# Altium PCB SLT.PcbDoc (part 6 of 8)
Units mm, origin at the board's own origin, x right, y up, seen from the top; angles counter-clockwise.
Board outline 150 x 66 mm, 6 copper layers (L1 TOP, L2 GND 1, L3 SIGNAL, L4 PWR, L5 GND 2, L6 BOT), stack 1.598 mm thick; 797 components, 541 nets, 2680 pads, 2120 vias.
Unrouted connection lines stored in the file: 31.
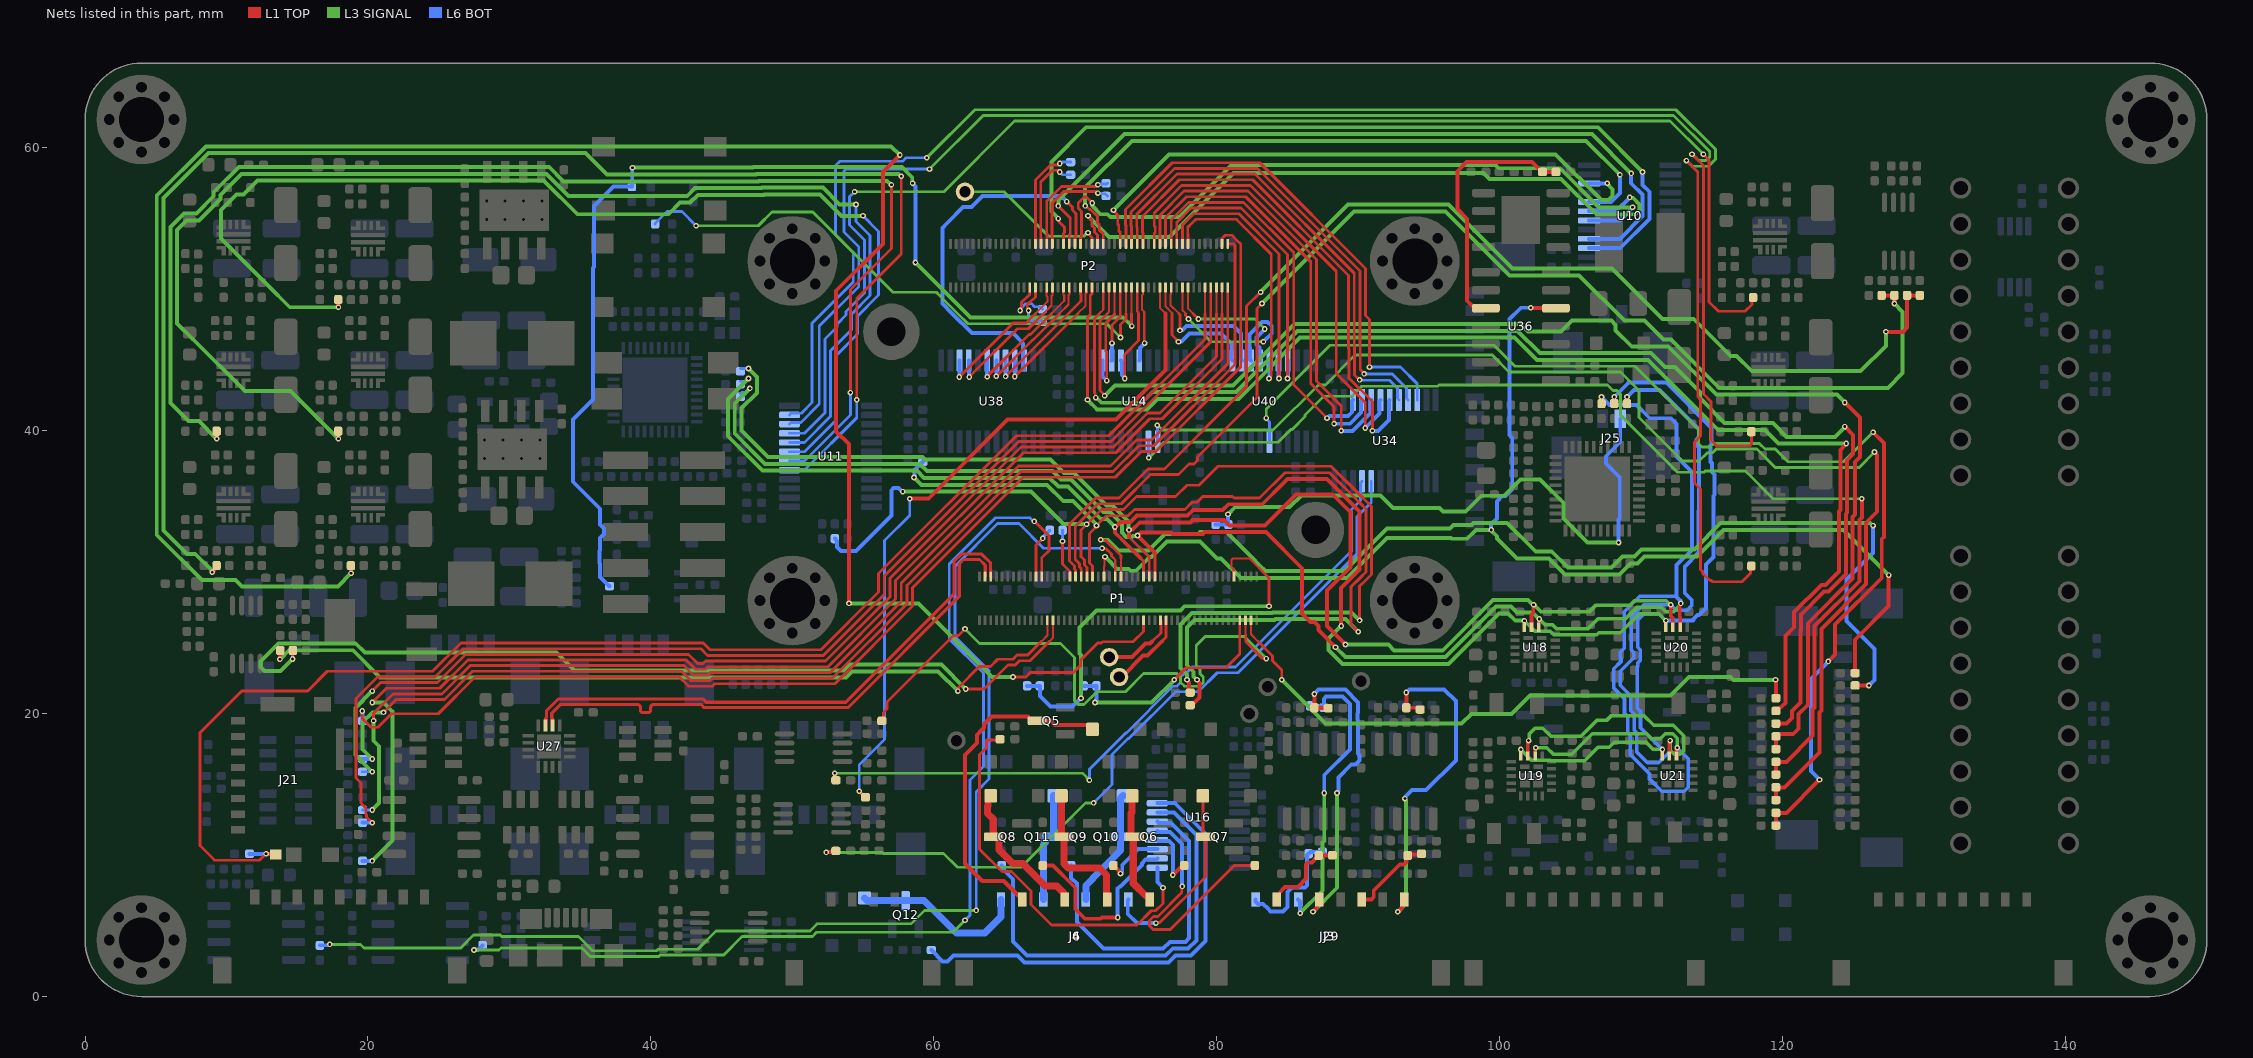
[diagram p10: the nets of this part, all layers, seen from the top]

## Via types
v1: diameter 0.4, hole 0.2, L1 TOP to L6 BOT, tented both sides, 2120 vias

## Nets (pads, with @x,y where several pads share a name; then routed paths per layer and width w, separated by ;. In a path a pad name is that pad's centre, name@x,y a point inside that pad or via, vN(x,y) a via of type N, cw(c..) or ccw(c..) an arc to the next point about the centre after c; other vN are vias at no path point) (continued)
NTC3-: J3.6 R170.1 R173.2 | length 21.1
  L3 SIGNAL w0.28: v1(85.9,5.9) 87.49,7.49 87.49,10.89 87.6,11 v1(87.6,14.4)
  L6 BOT w0.28: J3.6@85.75,6.87 85.877,6.743 85.877,5.923 v1(85.9,5.9) ; R170.1@86.595,20.56 86.657,20.497 87.507,20.497 R173.2@87.57,20.435 87.57,21.056 87.734,21.22 88.896,21.22 89.411,20.705 89.411,17.471 87.6,15.661 v1(87.6,14.4)
NTC4-: J3.8 R176.1 R179.2 | length 9
  L6 BOT w0.28: J3.8@82.75,6.87 82.75,6.723 82.91,6.563 83.277,6.563 83.61,6.229 83.809,6.03 84.691,6.03 85,6.339 85,7.401 85.309,7.71 86.224,7.71 86.388,7.874 86.388,10.003 86.62,10.235 R179.2@87.47,10.235 87.49,10.235 R179.2@87.649,10.076
NTC5-: J29.2 R160.1 R162.2 | length 6
  L1 TOP w0.28: J29.2@84.25,6.87 84.41,7.03 84.41,7.31 84.84,7.74 85.74,7.74 86.1,8.1 86.1,8.157 86.3,8.357 86.3,9.336 86.464,9.5 86.725,9.5 87.021,9.796 87.041,9.796 87.2,9.955 R160.1@87.2,9.975 87.212,9.987 88.163,9.987 R162.2@88.175,10
NTC6-: J29.4 R166.1 R168.2 | length 23
  L1 TOP w0.28: v1(86.8,6) 87.09,6.29 87.09,6.71 J29.4@87.25,6.87 ; v1(86.9,21.4) R166.1@86.9,20.425 86.925,20.4 R168.2@87.875,20.4
  L3 SIGNAL w0.28: v1(86.8,6) 88.5,7.7 v1(88.5,14.4)
  L6 BOT w0.28: v1(86.9,21.4) 87.2,21.7 89.1,21.7 90,20.8 90,20.074 89.95,20.024 89.95,19.576 90,19.526 90,17.193 90.09,17.103 90.09,16.697 89.803,16.41 89.51,16.41 88.6,15.5 88.6,14.532 88.5,14.432 v1(88.5,14.4)
NTC7-: J29.6 R172.1 R174.2 | length 6
  L1 TOP w0.28: J29.6@90.25,6.87 90.936,6.87 91.1,7.034 91.1,7.501 92.939,9.34 93.236,9.34 93.4,9.504 93.4,9.875 R172.1@93.5,9.975 ; R172.1@93.562,10.038 94.413,10.038 R174.2@94.475,10.1
NTC8-: J29.8 R178.1 R180.2 | length 24.3
  L1 TOP w0.28: v1(92.8,6) 93.09,6.29 93.09,6.71 J29.8@93.25,6.87 ; v1(93.4,21.5) R178.1@93.4,20.425 94.25,20.425 R180.2@94.375,20.3
  L3 SIGNAL w0.28: v1(92.8,6) 93.39,6.59 93.39,13.878 93.3,13.968 v1(93.3,14)
  L6 BOT w0.28: v1(93.3,14) 93.323,14.023 93.323,14.123 93.8,14.6 94.8,14.6 96.9,16.7 96.9,20.9 96.08,21.72 93.634,21.72 93.414,21.5 v1(93.4,21.5)
PHOTO_ADC_CONV: R62.1 R256.2 U14.16 | length 87.8
  L1 TOP w0.28: R256.2@119.525,13.9 R62.1@119.525,14.8 120.136,14.8 122.61,17.274 122.61,20.103 122.74,20.233 122.74,25.998 125.91,29.168 125.91,33.503 126.69,34.283 126.69,38.278 126.5,38.468 v1(126.5,38.5)
  L3 SIGNAL w0.2: v1(75.8,40.4) 75.807,40.4 76.157,40.05 83.984,40.05 87.184,43.25 87.686,43.25 89.786,45.35 99.478,45.35 100.66,44.168 108.534,44.168 109.85,42.852 109.85,40.934 112.914,37.87 114.102,37.87 114.682,38.45 115.042,38.45 115.308,38.715 118.183,38.715 119.474,37.424 119.483,37.415 121.476,37.415 125.415,37.415 v1(126.5,38.5)
  L6 BOT w0.2: v1(75.8,40.4) 75.813,40.388 75.813,39.242 U14.16@75.825,39.23
PHOTO_ADC_CS: R61.1 R85.2 U14.17 | length 80.5
  L1 TOP w0.28: R61.1@119.525,15.7 R85.2@119.525,16.6 120.27,16.6 122.13,18.46 122.13,20.302 122.26,20.432 122.26,26.196 125.43,29.366 125.43,33.702 125.6,33.872 v1(125.6,35.2)
  L3 SIGNAL w0.2: v1(75.2,38.1) 76.29,39.19 84.322,39.19 85.232,40.1 85.336,40.1 86.25,41.014 86.25,41.118 87.582,42.45 89.553,42.45 90.253,43.15 95.606,43.15 95.706,43.25 107.614,43.25 108.014,42.85 108.286,42.85 108.55,42.586 108.55,41.102 112.582,37.07 114.434,37.07 114.514,37.15 116.477,37.15 117.372,37.15 119.322,35.2 121.476,35.2 v1@125.624,35.2
  L6 BOT w0.2: U14.17@75.175,39.23 75.187,39.218 75.187,38.113 v1(75.2,38.1)
PHOTO_ADC_EOC: R63.1 R275.2 U40.18 | length 84.5
  L1 TOP w0.28: R63.1@119.525,12.1 R275.2@119.525,13 120.27,13 v1(122.61,15.34) ; v1(123.23,23.7) 123.72,24.19 123.72,26.299 127.01,29.589 127.01,32.344 127.17,32.504 127.17,39.13 v1(126.4,39.9)
  L3 SIGNAL w0.2: v1(83.5,40.9) 83.5,41.536 88.017,46.054 99.61,46.054 101.095,44.568 109.568,44.568 114.05,40.086 114.05,39.114 114.314,38.85 114.877,38.85 115.142,39.115 118.348,39.115 118.748,38.715 119.481,38.715 120.381,37.815 124.315,37.815 v1(126.4,39.9)
  L6 BOT w0.2: v1(83.5,40.9) 83.5,40.846 83.725,40.621 U40.18@83.725,39.23
  L6 BOT w0.28: v1(122.61,15.34) 122,15.95 122,22.47 v1(123.23,23.7)
PHOTO_SPI7_MISO: P2.56 R59.1 | length 91.1
  L1 TOP w0.15: 71.711,48.3 71.979,48.568 P2.56@71.979,50.14
  L1 TOP w0.2: v1(71.45,42.35) 71.412,42.388 71.412,42.627 71.35,42.688 71.35,47.939 71.711,48.3
  L1 TOP w0.28: R59.1@119.525,19.3 120.27,19.3 120.66,19.69 120.66,20.189 121.27,20.799 121.27,25.885 121.3,25.915 121.3,27 122.937,28.637 123.237,28.637 124.47,29.87 124.47,34.114 124.563,34.207 124.563,37.921 124.99,38.348 124.99,39.71 v1(124.4,40.3)
  L3 SIGNAL w0.28: v1(71.45,42.35) 71.482,42.35 71.847,41.985 74.712,41.985 75.457,42.73 81.358,42.73 85.698,47.07 101.258,47.07 102.84,45.488 110.697,45.488 111.675,44.51 112.383,44.51 114.146,42.747 114.146,42.318 115.909,40.555 116.476,40.555 119.312,40.555 119.343,40.524 120.292,39.575 123.695,39.575 124.4,40.28 v1(124.4,40.3)
PHOTO_SPI7_MOSI: P2.52 R58.1 | length 88.4
  L1 TOP w0.2: v1(70.866,42.191) 70.866,48.021 71.054,48.209 71.054,48.3 71.054,49.566 71.179,49.691 P2.52@71.179,50.14
  L1 TOP w0.28: R58.1@119.525,20.2 119.555,20.2 119.815,20.46 119.903,20.46 120.19,20.747 120.19,25.484 120.82,26.114 120.82,27.199 122.738,29.117 123.038,29.117 123.99,30.069 123.99,34.313 124.083,34.406 124.083,38.651 124.5,39.068 v1(124.5,39.1)
  L3 SIGNAL w0.28: v1(70.866,42.191) 71.553,41.505 75.081,41.505 75.826,42.25 81.557,42.25 85.897,46.59 101.059,46.59 102.641,45.008 110.498,45.008 115.451,40.055 118.763,40.055 119.723,39.095 124.495,39.095 v1(124.5,39.1)
PHOTO_SPI7_SCK: P1.98 R57.1 | length 44
  L1 TOP w0.15: P1.98@82.425,26.61 82.425,25.611 82.936,25.1
  L1 TOP w0.2: 82.936,25.1 83.95,24.086 83.95,23.75 84.6,23.1 v1(84.6,22.4)
  L1 TOP w0.28: R57.1@119.525,21.1 v1@119.525,22.4
  L3 SIGNAL w0.28: v1(84.6,22.4) 87.69,19.31 97.317,19.31 97.997,19.99 100.852,19.99 102.152,21.29 112.069,21.29 113.369,22.59 116.323,22.59 116.513,22.4 v1(119.5,22.4)
PHOTO_SW_CS: P2.58 R60.1 R84.2 | length 93.7
  L1 TOP w0.15: 72.276,48.3 72.379,48.403 P2.58@72.379,50.14
  L1 TOP w0.2: v1(72.075,42.475) 72.075,42.529 71.75,42.854 71.75,47.774 72.276,48.3
  L1 TOP w0.28: R84.2@119.525,17.5 R60.1@119.525,18.4 119.679,18.554 120.754,18.554 121.14,18.94 121.14,19.991 121.78,20.631 121.78,26.395 124.95,29.565 124.95,33.916 125.11,34.076 125.11,37.789 125.47,38.149 125.47,40.93 v1(124.4,42)
  L3 SIGNAL w0.28: v1(72.075,42.475) 72.81,43.21 81.159,43.21 85.499,47.55 101.457,47.55 101.997,47.01 104.327,47.01 105.107,47.79 107.903,47.79 108.2,47.493 108.2,47.107 109.339,45.968 111.918,45.968 115.323,42.562 116.476,42.562 121.475,42.562 123.838,42.562 v1(124.4,42)
PMIC_ON_REQ: P1.68 TP4.0 | length 5.5
  L1 TOP w0.2: 76.115,25.1 76.425,25.41 P1.68@76.425,26.61
  L1 TOP w0.28: TP4.0@73.3,22.6 74.802,24.102 75.118,24.102 76.115,25.1
PMIC_STBY_REQ: P1.66 TP3.0 | length 5.3
  L1 TOP w0.2: 75.436,25.1 76.05,25.714 76.05,26.585 P1.66@76.025,26.61
  L1 TOP w0.28: TP3.0@72.4,24 74.021,24 74.976,24.954 75.291,24.954 75.436,25.1
POR_B_3P3: P2.66 R77.2 R252.2 | length 79.5
  L1 TOP w0.15: 73.979,48.3 P2.66@73.979,50.14
  L1 TOP w0.2: 73.979,48.3 73.979,47.421 v1(74,47.4)
  L3 SIGNAL w0.28: v1(38.7,58.6) 47.217,58.6 47.252,58.635 57.758,58.635 58.477,57.916 58.477,57.523 v1(58.5,57.5) ; v1(58.7,51.9) 60.4,50.2 62.3,48.3 62.59,48.01 73.39,48.01 v1(74,47.4)
  L6 BOT w0.28: R252.2@37.075,29.025 37.05,29.025 36.41,29.665 36.41,30.599 36.36,30.649 36.36,31.509 36.41,31.559 36.41,32.417 36.69,32.697 36.69,33.103 36.41,33.383 36.41,34.49 34.5,36.4 34.5,40.8 35.9,42.2 35.9,51.502 35.99,51.592 35.99,55.89 37.364,57.264 R77.2@38.665,57.264 38.683,57.282 38.683,58.583 v1(38.7,58.6) ; v1(58.5,57.5) 58.5,57.468 58.7,57.268 v1(58.7,51.9)
POW_ONOFF_CAM: R304.2 U11.9 | length 98.1
  L1 TOP w0.2: v1(114.4,59.55) 114.8,59.15 114.8,49.117 115.467,48.45 117.35,48.45 117.836,48.936 117.836,49.335 R304.2@117.917,49.416
  L3 SIGNAL w0.2: v1(54.4,56.9) 60.715,56.9 65.715,61.9 112.05,61.9 v1(114.4,59.55)
  L6 BOT w0.2: U11.9@49.8,39.825 50.85,39.825 52.3,41.275 52.3,46.5 53.15,47.35 53.15,47.534 53.8,48.184 53.8,48.431 55.1,49.731 55.1,53.5 54.05,54.55 54.05,56.543 54.4,56.893 v1(54.4,56.9)
POW_ONOFF_HD4: R31.2 U11.7 | length 81.7
  L1 TOP w0.3: R31.2@17.9,49.275 17.904,49.271 17.904,48.739 v1(17.908,48.735)
  L3 SIGNAL w0.28: v1(17.908,48.735) 14.472,48.735 12.901,50.306 9.61,53.597 9.61,55.603 10.607,56.6 10.717,56.71 11.217,56.71 12.197,57.69 32.419,57.69 34.799,55.31 41.251,55.31 42.071,56.13 42.771,56.13 43.321,56.68 48.012,56.68 48.047,56.715 51.953,56.715 53.468,55.2 v1(55,55.2)
  L6 BOT w0.2: U11.7@49.8,38.525 50.85,38.525 53.1,40.775 53.1,45.334 54.6,46.834 54.6,48.1 56.1,49.6 56.1,54.1 v1(55,55.2)
POW_ONOFF_Heater: R18.2 U11.5 | length 107.7
  L1 TOP w0.2: v1(54.55,42.2) 54.55,49.35 57.7,52.5 v1(57.7,58)
  L1 TOP w0.3: v1(9,30) 9,30.027 9.15,30.177 9.15,30.325 R18.2@9.3,30.475
  L3 SIGNAL w0.28: v1(9,30) 9,30.032 8.89,30.142 8.89,30.203 7.793,31.3 7.7,31.3 7.207,31.3 5.551,32.956 5.551,56.443 8.738,59.63 35.37,59.63 36.89,58.11 41.938,58.11 41.948,58.12 47.416,58.12 47.451,58.155 57.513,58.155 57.668,58 v1(57.7,58)
  L6 BOT w0.2: U11.5@49.8,37.225 50.85,37.225 54.55,40.925 v1(54.55,42.2)
POW_ONOFF_IO: P1.60 R15.2 | length 153.6
  L1 TOP w0.2: v1(65.6,22.6) 66.51,22.6 66.82,22.91 69.869,22.91 70.39,23.431 70.39,23.79 71.59,24.99 71.849,24.99 71.949,25.09 74.09,25.09 74.825,25.825 P1.60@74.825,26.61
  L1 TOP w0.28: v1(54,27.8) 54,39.068 53.1,39.968 53.1,49.9 56.4,53.2 56.4,58.3 v1(57.6,59.5)
  L1 TOP w0.3: R15.2@18.8,30.475 18.804,30.471 18.804,29.939 v1(18.808,29.935)
  L3 SIGNAL w0.28: v1(18.808,29.935) 17.883,29.01 11.083,29.01 10.648,29.445 8.262,29.445 5.071,32.636 5.071,56.642 8.539,60.11 56.99,60.11 v1(57.6,59.5) ; v1(54,27.8) 58.929,27.8 64.129,22.6 v1(65.6,22.6)
POW_ONOFF_Laser: R335.2 U11.11 | length 123
  L1 TOP w0.2: v1(113.2,59.1) 114,58.3 114,42.434 114.2,42.234 114.2,39.636 113.95,39.386 113.95,39.372 113.77,39.192 113.77,36.315 114.2,35.885 114.2,30.2 114.36,30.04 114.36,29.918 114.86,29.418 114.975,29.418 115.058,29.335 117.135,29.335 117.736,29.936 117.736,30.383 R335.2@117.793,30.44
  L3 SIGNAL w0.2: v1(59.5,59.3) 62.9,62.7 112.452,62.7 115.25,59.902 115.25,59.198 114.752,58.7 113.6,58.7 v1(113.2,59.1)
  L6 BOT w0.2: U11.11@49.8,41.125 49.917,41.242 50.642,41.242 51.4,42 51.4,47.6 54.3,50.5 54.3,52.614 53.05,53.864 53.05,58.75 53.35,59.05 57.786,59.05 58.036,59.3 v1@59.493,59.3
POW_ONOFF_Photo: R327.2 U11.10 | length 111.2
  L1 TOP w0.2: v1@113.616,59.534 114.4,58.75 114.4,42.6 114.95,42.05 114.95,39.326 115.076,39.2 115.326,38.95 117.679,38.95 117.796,39.067 117.796,39.936 R327.2@117.792,39.94
  L3 SIGNAL w0.2: v1(59.7,58.5) 63.5,62.3 112.286,62.3 114.85,59.736 114.85,59.364 114.586,59.1 114.05,59.1 v1(113.6,59.55)
  L6 BOT w0.2: U11.10@49.8,40.475 49.917,40.592 50.601,40.592 51.9,41.892 51.9,47.4 54.7,50.2 54.7,53 53.65,54.05 53.65,58.35 53.8,58.5 v1(59.7,58.5)
POW_ONOFF_Solenoid: R37.2 U11.6 | length 93.9
  L1 TOP w0.2: v1(54.1,42.7) 54.1,50 57,52.9 v1(57,57.4)
  L1 TOP w0.3: R37.2@9.3,39.975 9.304,39.971 9.304,39.439 v1(9.308,39.435)
  L3 SIGNAL w0.28: v1(9.308,39.435) 8.043,40.7 7.307,40.7 6.031,41.976 6.031,54.403 6.986,55.358 7.601,55.358 7.868,55.358 9.092,56.582 9.092,56.6 9.092,56.864 10.878,58.65 32.816,58.65 33.836,57.63 42.914,57.63 42.924,57.64 47.614,57.64 47.649,57.675 56.693,57.675 56.968,57.4 v1(57,57.4)
  L6 BOT w0.2: U11.6@49.8,37.875 50.85,37.875 54.1,41.125 v1(54.1,42.7)
POW_ONOFF_TEC: R47.2 U11.8 | length 93.3
  L1 TOP w0.3: R47.2@17.9,39.975 17.904,39.971 17.904,39.439 v1(17.908,39.435)
  L3 SIGNAL w0.28: v1(17.908,39.435) 14.533,42.81 12.901,42.81 11.298,42.81 7.601,46.507 6.511,47.597 6.511,54.204 7.185,54.878 7.601,54.878 8.067,54.878 9.572,56.383 9.572,56.6 9.572,56.665 11.077,58.17 32.617,58.17 34.177,56.61 42.573,56.61 43.123,57.16 47.813,57.16 47.848,57.195 52.152,57.195 53.347,56 v1(54.5,56)
  L6 BOT w0.2: U11.8@49.8,39.175 50.85,39.175 52.7,41.025 52.7,45.664 54.2,47.164 54.2,48.266 55.5,49.566 55.5,53.8 54.5,54.8 v1(54.5,56)
RTC_BAT: C229.2 J25.1 R89.2 | length 43.3
  L3 SIGNAL w0.28: v1(80.8,34.1) 81.311,34.61 85.15,34.61 85.98,35.44 91.571,35.44 92.461,34.55 95.74,34.55 95.98,34.31 97.603,34.31 98.703,35.41 100.303,35.41 101.464,36.571 102.853,36.571 104.51,34.914 104.51,33.797 106.196,32.111 v1(108.411,32.111)
  L6 BOT w0.28: C229.2@79.921,33.375 R89.2@80.821,33.375 80.811,33.385 80.811,34.089 v1(80.8,34.1) ; v1(108.411,32.111) 108.411,33.718 108.49,33.797 108.49,36.703 107.51,37.683 107.51,38.203 108.525,39.218 J25.1@108.525,40.85
SD2_CLK: P2.96 R249.1 | length 83
  L1 TOP w0.15: 79.979,48.3 P2.96@79.979,50.14
  L1 TOP w0.2: v1(20.3,21.6) 20.9,22.2 24.906,22.2 26.906,24.2 38.455,24.2 42.664,24.2 43.314,23.55 43.686,23.55 43.861,23.725 52.351,23.725 56.9,28.274 56.9,29.575 66.175,38.85 72.697,38.85 75.097,41.25 75.986,41.25 79.979,45.243 79.979,48.3
  L3 SIGNAL w0.28: v1(20.3,15.9) 19.11,17.09 19.11,20.41 v1(20.3,21.6)
  L6 BOT w0.2: R249.1@19.625,15.9 v1(20.3,15.9)
SD2_CMD: P2.100 R250.1 | length 85.2
  L1 TOP w0.15: 80.779,48.3 P2.100@80.779,50.14
  L1 TOP w0.2: v1(20.4,19.5) 20.4,20.036 21.764,21.4 25.237,21.4 27.237,23.4 38.455,23.4 42.332,23.4 42.982,22.75 44.018,22.75 44.193,22.925 52.683,22.925 57.7,27.942 57.7,29.244 65.977,37.52 72.498,37.52 74.328,39.35 75.386,39.35 80.779,44.743 80.779,48.3
  L3 SIGNAL w0.28: v1(20.3,13.2) 20.79,13.69 20.79,17.703 20.4,18.093 v1(20.4,19.5)
  L6 BOT w0.2: R250.1@19.625,13.2 v1(20.3,13.2)
SD2_DATA0: P2.97 R242.1 | length 86.2
  L1 TOP w0.2: v1(19.6,20.2) 19.6,19.664 20.214,19.05 20.714,19.05 21.664,20 24.968,20 27.568,22.6 38.455,22.6 42.001,22.6 42.651,21.95 44.349,21.95 44.524,22.125 53.014,22.125 58.5,27.611 58.5,28.912 66.308,36.72 72.83,36.72 74.659,38.55 75.718,38.55 81.696,44.528 81.696,53.198 81.4,53.494 81.074,53.82 80.605,53.82 80.379,53.594 P2.97@80.379,53.22
  L6 BOT w0.28: v1(19.6,20.2) 19.613,20.187 19.613,19.512 R242.1@19.625,19.5
SD2_DATA1: P2.99 R243.1 | length 86
  L1 TOP w0.2: v1(21.1,20.1) 22,21 25.403,21 27.403,23 38.455,23 42.167,23 42.817,22.35 44.183,22.35 44.358,22.525 52.848,22.525 58.1,27.777 58.1,29.078 66.142,37.12 72.664,37.12 74.494,38.95 75.552,38.95 81.296,44.694 81.296,48.3 81.296,53.103 81.179,53.22 P2.99@80.779,53.22
  L3 SIGNAL w0.28: v1(20.3,16.8) 19.61,17.49 19.61,19.403 20.307,20.1 v1(21.1,20.1)
  L6 BOT w0.28: R243.1@19.625,16.8 v1(20.3,16.8)
SD2_DATA2: P2.94 R245.1 | length 85.8
  L1 TOP w0.15: 79.579,48.3 P2.94@79.579,50.14
  L1 TOP w0.2: v1(20.3,12.3) 19.9,12.7 19.9,12.886 19.85,12.936 19.85,13.35 19.5,13.7 19.5,15.1 19.15,15.45 19.15,21.086 20.664,22.6 24.74,22.6 26.74,24.6 38.455,24.6 43.536,24.6 44.011,24.125 52.186,24.125 56.5,28.439 56.5,29.741 66.009,39.25 72.531,39.25 79.579,46.298 79.579,48.3
  L6 BOT w0.28: R245.1@19.625,12.3 v1(20.3,12.3)
SD2_DATA3: P2.98 R247.1 | length 90
  L1 TOP w0.15: 80.379,48.3 P2.98@80.379,50.14
  L1 TOP w0.2: v1(20.3,20.8) 21.3,21.8 25.071,21.8 27.071,23.8 38.455,23.8 42.498,23.8 43.148,23.15 43.852,23.15 44.027,23.325 52.517,23.325 57.3,28.108 57.3,29.409 66.341,38.45 72.862,38.45 75.262,40.85 76.152,40.85 80.379,45.077 80.379,48.3
  L3 SIGNAL w0.28: v1(20.3,9.6) 21.75,11.05 21.75,20.143 21.093,20.8 v1(20.3,20.8)
  L6 BOT w0.28: R247.1@19.625,9.6 v1(20.3,9.6)
SD2_nCD: J21.P9 P2.92 R248.2 | length 102.6
  L1 TOP w0.15: 79.179,48.3 P2.92@79.179,50.14
  L1 TOP w0.2: v1(12.8,10.1) 12.35,9.65 9.15,9.65 8.125,10.675 8.125,18.661 11.082,21.618 15.74,21.618 17.122,23 24.574,23 26.574,25 38.455,25 43.702,25 44.177,24.525 52.02,24.525 56.1,28.605 56.1,29.906 65.844,39.65 72.365,39.65 79.179,46.464 79.179,48.3
  L1 TOP w0.28: v1(12.8,10.1) 12.823,10.077 13.445,10.077 J21.P9@13.482,10.04
  L6 BOT w0.28: R248.2@11.625,10.1 v1(12.8,10.1)
SD2_RESET: P2.51 TP5.0 | length 11
  L1 TOP w0.2: v1(70.9,54) 70.9,53.946 71.179,53.667 P2.51@71.179,53.22
  L3 SIGNAL w0.2: TP5.0@62.2,56.9 64.972,56.9 67.172,54.7 68.122,53.75 70.596,53.75 70.846,54 v1(70.9,54)
SENSOR1_EN: R219.2 U34.20 | length 54.6
  L1 TOP w0.28: v1(52.4,10.2) 52.423,10.223 52.998,10.223 R219.2@53.075,10.3
  L3 SIGNAL w0.2: v1(52.4,10.2) 56.367,10.2 56.437,10.13 60.692,10.13 61.672,9.15 66.165,9.15 70.715,13.7 v1(71.3,13.7)
  L6 BOT w0.2: v1(71.3,13.7) 72.6,15 72.6,17.113 73.737,18.25 73.778,18.25 77.078,21.55 78.686,21.55 80.036,22.9 81.5,22.9 89.9,31.3 89.9,33.9 90.925,34.925 U34.20@90.925,36.43
SENSOR2_EN: R220.2 U34.21 | length 49.9
  L1 TOP w0.28: v1(53,15.8) 53.023,15.777 53.023,15.352 R220.2@53.075,15.3
  L3 SIGNAL w0.2: v1(53,15.8) 70.5,15.8 v1(71,15.3)
  L6 BOT w0.2: v1(71,15.3) 71,16.078 73.572,18.65 73.613,18.65 76.913,21.95 77.186,21.95 77.45,22.214 77.45,22.586 77.714,22.85 77.813,22.85 78.263,23.3 81.334,23.3 89.5,31.466 89.5,34.4 90.17,35.07 90.17,36.325 U34.21@90.275,36.43
SOLENOID_A_1: DZ1.1 J4.2 Q5.3 | length 23.9
  L1 TOP w0.3: J4.2@66.25,6.87 66.25,7.07 66.2,7.12 66,7.12 64.94,8.18 63.42,8.18 62.2,9.4 62.2,17.086 63.046,17.932 63.046,18.504 63.393,18.85 63.555,19.013 63.555,19.255 64.1,19.8 66.64,19.8 66.94,19.5 68.273,19.5 68.573,19.2 70.922,19.2 DZ1.1@71.219,18.903
SOLENOID_A_2: DZ2.1 J4.4 Q8.3 | length 10.8
  L1 TOP w0.5: DZ2.1@64.019,14.203 63.823,14.007 63.823,13.472 63.8,13.449 63.8,12.951 64.2,12.551 Q8.3@64.2,11.3 64.25,11.25 64.61,11.25 64.61,10.388 65.598,9.4 66.3,9.4 67.88,7.82 68.691,7.82 69.2,7.311 69.2,6.92 J4.4@69.25,6.87
SOLENOID_A_3: DZ3.1 J4.6 Q9.3 | length 10
  L1 TOP w0.5: DZ3.1@69.019,14.203 69.019,11.35 69.069,11.3 Q9.3@69.2,11.3 69.2,9.393 69.493,9.1 71.701,9.1 72.2,8.602 72.2,6.92 J4.6@72.25,6.87
SOLENOID_A_4: DZ4.1 J4.8 Q6.3 | length 8
  L1 TOP w0.5: Q6.3@74.019,11.35 73.95,11.35 73.95,12.969 74.019,13.038 DZ4.1@74.019,14.203 ; Q6.3@74.2,11.3 74.15,11.3 74.1,11.25 74.1,8.02 75,7.12 75.2,7.12 75.25,7.07 J4.8@75.25,6.87
SOLENOID_A_5: DZ5.1 J6.2 Q7.3 | length 14
  L1 TOP w0.2: v1(75.7,5.2) 75.738,5.238 75.974,5.238 79.2,8.464 Q7.3@79.2,11.3 79.019,11.481 DZ5.1@79.019,14.203
  L6 BOT w0.28: J6.2@73.75,6.87 73.71,6.83 73.71,5.856 74.366,5.2 v1(75.7,5.2)
SOLENOID_A_6: DZ6.1 J6.4 Q10.3 | length 8.4
  L6 BOT w0.5: J6.4@70.75,6.87 70.75,7.85 71.243,8.343 71.243,8.38 73.2,10.337 73.2,14.022 DZ6.1@73.381,14.203
SOLENOID_A_7: DZ7.1 J6.6 Q11.3 | length 7.9
  L6 BOT w0.5: J6.6@67.75,6.87 67.75,10.75 67.89,10.89 67.89,11.25 67.94,11.3 Q11.3@68.3,11.3 68.431,11.3 68.481,11.35 DZ7.1@68.481,14.203
SOLENOID_A_8: DZ8.1 J6.8 Q12.3 | length 12.4
  L6 BOT w0.5: DZ8.1@55.097,6.981 55.278,6.8 Q12.3@58,6.8 59.3,6.8 61.6,4.5 63.6,4.5 64.75,5.65 J6.8@64.75,6.87
SOLENOID_CTR_1: R197.2 U16.13 | length 28
  L1 TOP w0.2: R197.2@64.675,18.2 64.625,18.15 63.725,18.15 63.725,17.6 63.24,17.115 63.24,10.424 64.814,8.85 65.494,8.85 66.87,7.474 66.87,6.526 68.326,5.07 74.368,5.07 75.368,6.07 75.674,6.07 76.2,6.596 v1(76.2,7.7)
  L6 BOT w0.28: U16.13@75.8,9.125 75.8,8.1 v1(76.2,7.7)
SOLENOID_CTR_2: R200.2 U16.14 | length 13.6
  L1 TOP w0.28: R200.2@67.7,9.275 68.425,9.275 70,7.7 70,6.2 70.69,5.51 71.784,5.51 71.874,5.6 v1(73,5.6)
  L6 BOT w0.28: v1(73,5.6) 73,7.636 73.164,7.8 73.2,7.8 74.71,9.31 74.71,9.425 74.975,9.69 75.715,9.69 U16.14@75.8,9.775
SOLENOID_CTR_3: R201.2 U16.15 | length 4.4
  L1 TOP w0.28: R201.2@72.7,9.275 72.7,9.255 72.859,9.096 72.879,9.096 73.177,8.798 73.177,8.723 v1(73.2,8.7)
  L6 BOT w0.28: v1(73.2,8.7) 73.2,8.732 73.32,8.852 73.32,9.32 74.425,10.425 U16.15@75.8,10.425
SOLENOID_CTR_4: R198.2 U16.16 | length 4.5
  L1 TOP w0.28: v1(76.9,8.6) 77.396,9.096 77.541,9.096 77.7,9.255 R198.2@77.7,9.275
  L6 BOT w0.28: U16.16@75.8,11.075 75.885,10.99 76.625,10.99 76.9,10.715 v1(76.9,8.6)
SOLENOID_CTR_5: R199.2 U16.17 | length 18.5
  L1 TOP w0.2: v1(77.56,7.8) 77.521,7.762 77.521,7.351 75.84,5.67 75.534,5.67 75.25,5.386 75.25,5.014 75.514,4.75 76.713,4.75 81.238,9.275 R199.2@82.7,9.275
  L6 BOT w0.28: U16.17@75.8,11.725 75.885,11.64 76.696,11.64 77.54,10.797 v1@77.54,7.8
SOLENOID_CTR_6: R207.2 U16.18 | length 22.9
  L6 BOT w0.28: R207.2@69.7,9.275 69.7,8.4 70.11,7.99 70.11,5.29 72,3.4 76.212,3.4 76.692,3.88 77.78,3.88 78.05,4.15 78.05,11.008 76.767,12.29 75.885,12.29 U16.18@75.8,12.375
SOLENOID_CTR_7: R208.2 U16.19 | length 30.4
  L6 BOT w0.28: R208.2@64.8,9.275 64.954,9.121 64.954,8.946 65.6,8.3 65.6,3.9 66.6,2.9 76.39,2.9 76.89,3.4 77.979,3.4 78.56,3.981 78.56,11.44 76.975,13.025 U16.19@75.8,13.025
SOLENOID_CTR_8: R209.2 U16.20 | length 32.6
  L6 BOT w0.28: R209.2@59.825,3.3 60.625,2.5 60.959,2.5 61.379,2.92 65.901,2.92 66.401,2.42 76.589,2.42 77.089,2.92 77.912,2.92 78.178,2.92 79.205,3.947 79.205,11.517 77.046,13.675 U16.20@75.8,13.675
SOM_ADC2_nERROR: P2.84 U40.5 | length 13.7
  L1 TOP w0.15: P2.84@77.579,50.14 77.579,48.526 77.8,48.305 77.8,48.3
  L1 TOP w0.2: 77.8,48.3 77.8,48.154 78,47.954 v1(78,47.9)
  L3 SIGNAL w0.2: v1(78,47.9) 79.6,46.3 v1(83.3,46.3)
  L6 BOT w0.28: U40.5@82.425,44.97 82.36,45.035 82.36,45.868 82.33,45.898 82.33,46.823 83.197,47.69 83.603,47.69 83.89,47.403 83.89,46.89 v1(83.3,46.3)
SOM_ADC2_nSYNC: P2.73 U34.6 | length 32.8
  L1 TOP w0.2: P2.73@75.579,53.22 75.579,53.943 75.65,54.014 75.65,54.401 75.579,54.472 75.579,54.7 75.579,55.41 77.519,57.35 82.381,57.35 88.45,51.281 88.45,45.587 ; 88.45,45.586 88.45,44.048 90.5,41.998 v1(90.5,40.2)
  L6 BOT w0.28: v1(90.5,40.2) 91.51,41.21 91.51,42.105 U34.6@91.575,42.17
SOM_ADC2_SPI_nCS: P2.75 U34.5 | length 32.2
  L1 TOP w0.2: P2.75@75.979,53.22 75.979,53.848 76,53.869 76,54.546 75.979,54.567 75.979,54.7 75.979,55.244 77.685,56.95 82.215,56.95 87.05,52.115 87.05,43.514 88.8,41.764 v1(88.8,40)
  L6 BOT w0.28: v1(88.8,40) 89.603,40 90.86,41.257 90.86,42.105 U34.5@90.925,42.17
SOM_ADC_nERROR: P2.80 U40.4 | length 9.9
  L1 TOP w0.15: P2.80@76.779,50.14 76.779,49.656 76.729,49.606 76.729,48.881 77.31,48.3
  L1 TOP w0.2: 77.31,48.3 77.4,48.21 v1(77.4,47.1)
  L6 BOT w0.28: v1(77.4,47.1) 77.423,47.123 77.58,47.123 77.858,47.4 81.2,47.4 81.71,46.89 81.71,45.035 U40.4@81.775,44.97
SOM_ADC_nSYNC: P2.38 U38.4 | length 10.4
  L1 TOP w0.15: 67.767,48.3 68.325,48.858 68.325,49.526 68.379,49.58 P2.38@68.379,50.14
  L1 TOP w0.2: v1(62.5,43.8) 65.914,47.214 66.681,47.214 67.767,48.3
  L6 BOT w0.28: U38.4@62.475,44.97 62.475,43.857 v1@62.5,43.832
SOM_ADC_SPI_nCS: P2.36 U38.3 | length 10.6
  L1 TOP w0.15: 67.201,48.3 68.025,49.124 68.025,49.476 67.979,49.522 P2.36@67.979,50.14
  L1 TOP w0.2: v1(61.8,43.8) 65.614,47.614 66.515,47.614 67.201,48.3
  L6 BOT w0.28: v1(61.8,43.8) 61.8,43.832 61.825,43.857 U38.3@61.825,44.97
SOM_CAM_CK_N: P2.30 R194.1 | length 3.9
  L1 TOP w0.2: v1(66.1,48.5) 66.1,48.554 66.2,48.654 66.2,49.092 66.576,49.468 66.612,49.468 66.779,49.635 P2.30@66.779,50.14
  L6 BOT w0.2: v1(66.1,48.5) 66.138,48.538 66.138,48.629 66.498,48.988 66.902,48.988 67.121,48.769 67.506,48.769 R194.1@67.675,48.6
SOM_CAM_CK_P: P2.32 R195.1 | length 3.6
  L1 TOP w0.2: v1(66.7,48.5) 66.7,48.554 66.6,48.654 66.6,48.926 66.741,49.068 66.777,49.068 67.179,49.469 P2.32@67.179,50.14
  L6 BOT w0.2: v1(66.7,48.5) 66.704,48.496 66.704,48.3 66.704,47.917 66.821,47.8 67.575,47.8 R195.1@67.675,47.7
SOM_CAM_D0_N: P2.31 R123.1 | length 7.5
  L1 TOP w0.2: P2.31@67.179,53.22 67.179,53.665 67.199,53.685 67.199,54.7 67.199,57.728 68.251,58.78 68.726,58.78 68.846,58.9 v1(68.9,58.9)
  L6 BOT w0.2: v1(68.9,58.9) 68.954,58.9 69.054,59 R123.1@69.675,59
SOM_CAM_D0_P: P2.33 R189.1 | length 7
  L1 TOP w0.2: P2.33@67.579,53.22 67.579,53.665 67.559,53.685 67.559,54.7 67.559,57.579 68.4,58.42 68.726,58.42 68.846,58.3 v1(68.9,58.3)
  L6 BOT w0.2: v1(68.9,58.3) 68.91,58.3 69.11,58.1 R189.1@69.675,58.1
SOM_CAM_D1_N: P2.35 R190.1 | length 7.8
  L1 TOP w0.2: P2.35@67.979,53.22 67.979,53.665 67.999,53.685 67.999,53.856 67.99,53.865 67.99,54.7 67.99,56.236 69.034,57.28 71.426,57.28 71.546,57.4 v1(71.6,57.4)
  L6 BOT w0.2: v1(71.6,57.4) 71.638,57.438 72.213,57.438 R190.1@72.275,57.5
SOM_CAM_D1_P: P2.37 R193.1 | length 7.3
  L1 TOP w0.2: P2.37@68.379,53.22 68.379,53.665 68.359,53.685 68.359,54.005 68.35,54.014 68.35,54.7 68.35,56.086 69.184,56.92 71.426,56.92 71.546,56.8 v1(71.6,56.8)
  L6 BOT w0.2: v1(71.6,56.8) 71.638,56.762 72.113,56.762 R193.1@72.275,56.6
SOM_CAM_I2C3_SCL: P1.94 R74.2 R196.1 | length 16.1
  L1 TOP w0.15: 81.625,25.1 P1.94@81.625,26.61
  L1 TOP w0.2: v1(77,22.4) 77.85,23.25 80.652,23.25 81.625,24.223 81.625,25.1
  L3 SIGNAL w0.28: v1(71.4,20.8) 75.4,20.8 v1(77,22.4)
  L6 BOT w0.28: R74.2@70.6,21.975 R196.1@71.5,21.975 71.5,20.932 71.4,20.832 v1(71.4,20.8)
SOM_CAM_I2C3_SDA: P1.91 R75.2 R295.1 | length 30.6
  L1 TOP w0.15: P1.91@81.225,29.69 81.2,29.715 81.2,30.199 81.05,30.349 81.05,30.887 81.138,30.975 82.322,30.975 83,30.297
  L1 TOP w0.2: 83,30.297 83.7,29.597 v1(83.7,27.6)
  L3 SIGNAL w0.28: v1(70.4,21.1) 70.4,24.159 70.31,24.249 70.31,25.1 70.31,26.103 71.507,27.3 77.431,27.3 77.731,27.6 83,27.6 v1(83.7,27.6)
  L6 BOT w0.28: R295.1@66.6,21.975 R75.2@67.5,21.975 67.5,21.264 68.254,20.51 69.81,20.51 v1(70.4,21.1)
SOM_CAN1_RX: P1.23 R265.1 | length 75.6
  L1 TOP w0.2: v1(67.1,33.6) 67.136,33.6 68.15,32.586 68.15,31.526 67.625,31.001 ; P1.23@67.625,29.69 67.625,31
  L3 SIGNAL w0.2: v1(27.5,3.3) 29.264,3.3 29.414,3.45 29.546,3.45 35.119,3.45 35.719,2.85 38.455,2.85 40.562,2.85 40.662,2.95 45.148,2.95 46.448,4.25 51.414,4.25 51.714,4.55 61.35,4.55 v1(62.2,5.4)
  L6 BOT w0.2: v1(62.2,5.4) 62.2,5.407 62.55,5.757 62.55,15.319 63.504,16.273 63.504,22.888 61.09,25.302 61.09,30.592 64.348,33.85 66.796,33.85 67.046,33.6 v1(67.1,33.6)
  L6 BOT w0.28: v1(27.5,3.3) 27.523,3.323 27.798,3.323 27.921,3.446 27.941,3.446 28.1,3.605 R265.1@28.1,3.625
SOM_CAN1_TX: P1.21 R258.1 | length 3.7
  L1 TOP w0.2: P1.21@67.225,29.69 67.225,31 67.225,31.925 v1(67.7,32.4)
  L6 BOT w0.2: v1(67.7,32.4) 67.738,32.438 67.738,32.513 R258.1@68.2,32.975
SOM_CAN2_RX: P1.49 R95.1 | length 89.2
  L1 TOP w0.15: 72.7,31 72.825,30.875 P1.49@72.825,29.69
  L1 TOP w0.2: v1(71.9,31.7) 71.938,31.662 72.175,31.662 72.55,31.286 72.55,31.15 72.7,31
  L3 SIGNAL w0.2: v1(17.3,3.7) 19.464,3.7 19.714,3.45 26.556,3.45 27.456,4.35 29.351,4.35 29.451,4.25 29.546,4.25 34.885,4.25 35.885,3.25 38.455,3.25 40.396,3.25 40.496,3.35 43.314,3.35 44.614,4.65 51.248,4.65 51.748,5.15 58.386,5.15 59.336,6.1 v1(63,6.1)
  L6 BOT w0.2: v1(63,6.1) 63,14.474 63.904,15.378 63.904,23.054 61.49,25.468 61.49,30.426 64.514,33.45 66.014,33.45 67.764,31.7 v1(71.9,31.7)
  L6 BOT w0.25: R95.1@16.6,3.625 16.61,3.635 17.194,3.635 17.259,3.7 v1(17.3,3.7)
SOM_CAN2_TX: P1.33 R93.1 | length 3.5
  L1 TOP w0.2: v1(69.1,32.2) 69.1,31 69.1,30.589 69.625,30.064 P1.33@69.625,29.69
  L6 BOT w0.2: v1(69.1,32.2) R93.1@69.1,32.975
SOM_DSUB_I2C_EN: P2.45 U38.10 | length 27.3
  L1 TOP w0.2: v1(69.4,56.2) 69.794,55.806 69.794,55.604 70.05,55.348 70.05,54.7 70.05,53.824 69.979,53.753 P2.45@69.979,53.22
  L6 BOT w0.28: U38.10@66.4,44.342 66.31,44.432 66.31,46.19 65.6,46.9 62.7,46.9 61.3,48.3 60.6,49 60.6,54.35 60.95,54.7 62.06,55.81 62.651,55.81 63.441,56.6 69,56.6 v1(69.4,56.2)
SOM_HD42_I2C8_SCL: P1.37 R191.2 R279.2 | length 87.5
  L1 TOP w0.2: P1.37@70.425,29.69 70.425,30.251 70.3,30.376 70.3,30.6 70,30.9 70,33.236 71.614,34.85 73.252,34.85 75.31,36.908 77.308,36.908 78.05,37.65 78.386,37.65 78.65,37.914 78.65,38.15 82.85,42.35 82.85,48.643 83.2,48.993 v1(83.2,49)
  L1 TOP w0.28: R191.2@127,49.575 R279.2@127.9,49.575 v1(127.9,49)
  L3 SIGNAL w0.28: v1(83.2,49) 89.715,55.515 96.172,55.515 100.697,50.99 105.617,50.99 108.817,47.79 110.246,47.79 111.588,46.448 112.116,46.448 115.522,43.042 116.476,43.042 121.475,43.042 127.447,43.042 128.49,44.085 128.49,48.41 v1(127.9,49)
SOM_HD42_I2C8_SDA: P1.35 R192.2 R280.2 | length 85.7
  L1 TOP w0.2: P1.35@70.025,29.69 70.025,30.156 69.95,30.231 69.95,30.45 69.6,30.8 69.6,31 69.6,33.402 71.448,35.25 73.086,35.25 75.144,37.308 76.308,37.308 82.112,43.112 82.112,48.812 v1(83.1,49.8)
  L1 TOP w0.28: v1(127.3,47) 128.5,47 128.8,47.3 R280.2@128.8,49.575 R192.2@129.7,49.575
  L3 SIGNAL w0.28: v1(83.1,49.8) 89.295,55.995 96.371,55.995 100.896,51.47 107.937,51.47 111.502,47.905 113.719,47.905 116.334,45.29 116.476,45.29 116.751,45.29 117.819,44.222 121.475,44.222 125.515,44.222 127.3,46.007 v1(127.3,47)
SOM_HD_I2C_EN: P2.61 U10.10 | length 43.3
  L1 TOP w0.2: v1(72.7,55.6) 72.7,55.546 73,55.246 73,54.7 73,54.605 73.079,54.526 73.079,54.135 73.179,54.035 P2.61@73.179,53.22
  L3 SIGNAL w0.28: v1(72.7,55.6) 76.64,59.54 103.962,59.54 107.192,56.31 107.703,56.31 107.99,56.597 107.99,57.078 107.6,57.468 v1(107.6,57.5)
  L6 BOT w0.28: U10.10@106.33,57.475 106.343,57.487 107.587,57.487 v1(107.6,57.5)
SOM_I2C5_SCL: P1.26 R103.2 | length 59.6
  L1 TOP w0.15: 67.591,25.1 68.025,25.534 P1.26@68.025,26.61
  L1 TOP w0.2: v1(61.7,21.6) 61.738,21.638 61.738,21.867 63.212,23.34 64.009,23.34 64.519,23.85 65.592,23.85 65.892,24.15 66.641,24.15 67.591,25.1
  L1 TOP w0.22: v1(13.775,23.85) R103.2@13.775,24.525
  L3 SIGNAL w0.28: v1(13.775,23.85) 14.415,24.49 18.938,24.49 20.858,22.57 34.401,22.57 34.406,22.565 53.806,22.565 54.231,22.99 60.31,22.99 v1(61.7,21.6)
SOM_I2C5_SDA: P1.28 R105.2 | length 64.8
  L1 TOP w0.15: 68.157,25.1 68.425,25.368 P1.28@68.425,26.61
  L1 TOP w0.2: v1(62.254,21.746) 63.544,21.746 65.248,23.45 65.758,23.45 66.058,23.75 66.807,23.75 68.157,25.1
  L1 TOP w0.22: v1(14.675,23.87) R105.2@14.675,24.525
  L3 SIGNAL w0.28: v1(14.675,23.87) 13.815,23.01 12.697,23.01 12.41,23.297 12.41,23.703 13.677,24.97 19.137,24.97 19.791,24.316 33.333,24.316 34.604,23.045 53.607,23.045 54.032,23.47 60.53,23.47 v1(62.254,21.746)
SOM_IOX_I2C7_SCL: P1.41 R312.1 R319.1 | length 69.6
  L1 TOP w0.2: P1.41@71.225,29.69 71.225,30.441 71,30.666 71,31 71,32.746 71.5,33.246 v1(71.5,33.3) 72.2,34 73.727,34 74.177,34.45 77.756,34.45 78.256,34.95 78.614,34.95 79.014,35.35 81.114,35.35 81.214,35.25 83.035,35.25 84.825,37.04 87.982,37.04 89.78,35.242 90.14,34.882 90.54,34.482 90.54,30.018 90.14,29.618 89.5,28.978 89.5,26.307 90,25.807 v1(90,25.8)
  L1 TOP w0.28: R319.1@78.125,20.6 78.279,20.754 78.397,20.754 78.79,21.147 78.79,22.178 78.6,22.368 v1(78.6,22.4)
  L3 SIGNAL w0.28: v1(58.6,36.7) 59.12,36.18 68.012,36.18 69.15,35.042 69.851,35.042 71.477,33.416 71.477,33.323 v1(71.5,33.3) ; v1(78.6,22.4) 78.6,22.414 78.37,22.644 78.37,22.967 77.91,23.427 77.91,25.1 77.91,26.103 78.437,26.63 83,26.63 84.102,26.63 84.162,26.69 89.11,26.69 v1(90,25.8)
  L6 BOT w0.28: v1(58.6,36.7) 58.623,36.723 58.623,37.223 59.2,37.8 R312.1@59.225,37.8
SOM_IOX_I2C7_SDA: P1.39 R311.1 R318.1 | length 76.2
  L1 TOP w0.2: P1.39@70.825,29.69 70.825,30.346 70.65,30.521 70.65,30.85 70.5,31 70.4,31.1 70.4,33 71.85,34.45 73.418,34.45 74.318,35.35 77.086,35.35 77.886,36.15 78.75,36.15 80.1,37.5 88.088,37.5 90.18,35.408 90.54,35.048 90.94,34.648 90.94,29.852 90.54,29.452 90.1,29.012 v1(90.1,26.6)
  L1 TOP w0.28: v1(77.9,22.4) 77.9,22.368 78.048,22.22 78.048,21.577 R318.1@78.125,21.5
  L3 SIGNAL w0.28: v1(57.8,35.7) 66.859,35.7 69.159,33.4 v1(70.8,33.4) ; v1(77.9,22.4) 77.89,22.41 77.89,22.769 77.43,23.229 77.43,25.1 77.43,26.302 78.238,27.11 83,27.11 83.903,27.11 83.963,27.17 89.53,27.17 v1(90.1,26.6)
  L6 BOT w0.28: R311.1@53,32.375 53.154,32.221 53.154,31.8 53.454,31.5 54.5,31.5 57,34 57,35.8 57.164,35.964 57.504,35.964 57.768,35.7 v1(57.8,35.7)
SOM_LASER_DAC_LATCH: P2.47 U10.6 | length 49.3
  L1 TOP w0.2: P2.47@70.379,53.22 70.379,53.658 70.45,53.729 70.45,54.7 70.45,55.514 70.216,55.748 70.216,56.116 70.617,56.517 70.783,56.517 v1(71.2,56.1)
  L3 SIGNAL w0.28: v1(71.2,56.1) 71.223,56.077 71.223,55.884 71.797,55.31 72.283,55.31 72.483,55.11 77.373,55.11 81.053,58.79 99.703,58.79 99.933,58.56 104.263,58.56 107.023,55.8 v1(109.4,55.8)
  L6 BOT w0.28: U10.6@106.33,54.875 108.507,54.875 109.4,55.768 v1(109.4,55.8)
SOM_LASER_SW_EXT_CS: P2.55 U10.8 | length 48.5
  L1 TOP w0.2: v1(70.7,55.9) 70.754,55.9 71.004,55.65 71.086,55.65 71.564,55.173 71.564,54.7 71.7,54.564 71.7,54.205 71.979,53.926 P2.55@71.979,53.22
  L3 SIGNAL w0.28: v1(70.7,55.9) 70.7,57.193 74.007,60.5 106.1,60.5 v1(108.5,58.1)
  L6 BOT w0.28: U10.8@106.33,56.175 107.875,56.175 108.5,56.8 v1(108.5,58.1)
SOM_LASER_SW_INT_CS: P2.53 U10.7 | length 49.4
  L1 TOP w0.2: v1(70.9,55.2) 70.9,55.146 71.164,54.882 71.164,54.529 71.35,54.343 71.35,54.06 71.579,53.831 P2.53@71.579,53.43
  L3 SIGNAL w0.28: v1(70.9,55.2) 71.4,54.7 72.39,53.71 76.651,53.71 77.641,54.7 81.176,58.235 98.872,58.235 99.297,57.81 104.335,57.81 106.835,55.31 109.603,55.31 109.89,55.597 109.89,56.003 109.416,56.477 109.223,56.477 v1(109.2,56.5)
  L6 BOT w0.28: U10.7@106.33,55.525 108.225,55.525 v1(109.2,56.5)
SOM_LED_CTRL: R268.2 R269.2 U36.10 | length 18.5
  L1 TOP w0.28: U36.10@99.025,48.67 98.871,48.824 98.07,48.824 97.7,49.194 97.7,54.99 97.005,55.685 97.005,58.348 97.657,59 102.3,59 103,58.3 R268.2@103.025,58.3 R269.2@103.975,58.3
SOM_LED_nLDAC: P2.43 U10.4 | length 54.8
  L1 TOP w0.2: v1(68.8,55.9) 69.65,55.05 69.65,54.7 69.65,53.919 69.579,53.848 P2.43@69.579,53.22
  L3 SIGNAL w0.28: v1(68.8,55.9) 68.823,55.923 68.823,56.316 73.487,60.98 106.52,60.98 v1(109.3,58.2)
  L6 BOT w0.28: U10.4@106.33,53.575 108.496,53.575 110.1,55.179 110.1,56.7 109.3,57.5 v1(109.3,58.2)
SOM_LED_SPI_nCS: P2.41 U10.3 | length 58.9
  L1 TOP w0.2: v1(68.8,55) 68.838,54.962 68.838,54.798 68.936,54.7 69.25,54.386 69.25,54.014 69.179,53.943 P2.41@69.179,53.22
  L3 SIGNAL w0.28: v1(68.8,55) 68.31,55.49 68.31,59.003 70.767,61.46 106.94,61.46 v1(110.1,58.3)
  L6 BOT w0.28: U10.3@106.33,52.925 108.525,52.925 110.58,54.98 110.58,56.899 110.1,57.379 v1(110.1,58.3)
SOM_ONOFF: P2.64 R73.2 | length 41.5
  L1 TOP w0.15: 73.579,48.3 P2.64@73.579,50.14
  L1 TOP w0.2: v1(73.2,46.6) 73.2,47.527 73.579,47.906 73.579,48.3
  L3 SIGNAL w0.2: v1(43.2,54.5) 47.586,54.5 48.561,55.475 51.439,55.475 57.114,49.8 60.178,49.8 60.4,49.578 61.678,48.3 62.408,47.57 72.23,47.57 v1(73.2,46.6)
  L6 BOT w0.2: R73.2@40.3,54.625 40.3,54.65 41.15,55.5 42.2,55.5 v1(43.2,54.5)
SOM_PHOTO_ADC_CS: P2.70 U14.7 | length 5.4
  L1 TOP w0.15: P2.70@74.779,50.14 74.779,49.656 74.729,49.606 74.729,48.555 74.875,48.409 74.875,48.3
  L1 TOP w0.2: 74.875,48.3 74.875,46.225 v1(74.9,46.2)
  L6 BOT w0.28: U14.7@74.525,44.97 74.59,45.035 74.59,45.858 74.9,46.168 v1(74.9,46.2)
SOM_PHOTO_ADC_EOC: P2.86 U40.6 | length 10.1
  L1 TOP w0.15: P2.86@77.979,50.14 77.979,48.621 78.3,48.3
  L1 TOP w0.2: 78.3,48.3 v1(78.7,47.9)
  L3 SIGNAL w0.2: v1(78.7,47.9) 82.7,47.9 v1(83.4,47.2)
  L6 BOT w0.28: U40.6@83.075,44.97 83.01,45.035 83.01,45.897 82.81,46.097 82.81,46.61 v1(83.4,47.2)
SOM_SENSOR1_EN: P2.77 U34.4 | length 29.9
  L1 TOP w0.2: P2.77@76.379,53.22 76.379,54.7 76.379,55.078 77.851,56.55 82.049,56.55 86.65,51.949 86.65,43.348 88.3,41.698 v1(88.3,40.5)
  L6 BOT w0.28: v1(88.3,40.5) 89.425,40.5 90.21,41.285 90.21,42.105 U34.4@90.275,42.17
SOM_SENSOR1_nIRQ: P1.96 R322.2 | length 43.7
  L1 TOP w0.15: P1.96@82.025,26.61 82.025,25.617 82.05,25.593 82.05,25.1
  L1 TOP w0.2: R322.2@56.325,19.5 56.454,19.629 56.454,20.1 56.7,20.346 56.7,20.836 61.404,25.54 61.74,25.54 v1(62.2,26) ; 82.05,25.1 83.221,23.929 83.471,23.929 v1(83.5,23.9)
  L3 SIGNAL w0.2: v1(62.2,26) 62.5,25.7 63.1,25.1 63.226,24.974 68.962,24.974 69.95,23.986 69.95,20.914 70.214,20.65 70.614,20.65 71.514,21.55 73.535,21.55 74.835,22.85 77.186,22.85 77.45,22.586 77.45,22.214 77.714,21.95 78.786,21.95 79.05,22.214 79.05,22.586 78.81,22.826 78.81,23.15 78.55,23.41 78.55,24.814 78.836,25.1 79.186,25.45 81.95,25.45 82.3,25.1 v1(83.5,23.9)
SOM_SENSOR2_EN: P2.79 U34.3 | length 27.8
  L1 TOP w0.2: P2.79@76.779,53.22 76.779,54.7 76.779,54.912 78.017,56.15 81.883,56.15 85.45,52.583 85.45,43.25 v1(87.8,40.9)
  L6 BOT w0.28: v1(87.8,40.9) 87.832,40.9 87.977,41.045 89.291,41.045 89.56,41.314 89.56,42.105 U34.3@89.625,42.17
SOM_SENSOR2_nIRQ: P2.76 R323.2 | length 50.4
  L1 TOP w0.15: P2.76@75.979,49.93 75.979,48.691 76.37,48.3
  L1 TOP w0.2: v1(54.724,14.518) 54.728,14.518 55.146,14.1 R323.2@55.175,14.1
  L1 TOP w0.28: v1(58.3,35.2) 59.618,35.2 65.208,40.79 72.883,40.79 76.39,44.297 76.39,47.197 76.39,48.28 76.37,48.3
  L6 BOT w0.2: v1(54.724,14.518) 54.724,16.375 56.525,18.176 56.525,32.25 58.3,34.025 v1(58.3,35.2)
SOM_TEC_nCS_1: P2.69 U34.7 | length 35
  L1 TOP w0.2: P2.69@74.779,53.22 74.779,53.985 74.75,54.014 74.75,54.7 74.75,55.146 77.354,57.75 82.546,57.75 89.325,50.971 89.325,45.815 89.35,45.79 89.35,43.714 91,42.064 v1(91,40)
  L6 BOT w0.28: v1(91,40) 91.4,40 92.165,40.765 92.165,42.11 U34.7@92.225,42.17
SOM_TEC_nCS_2: P2.67 U34.8 | length 33
  L1 TOP w0.2: P2.67@74.379,53.22 74.379,54.376 74.35,54.405 74.35,54.7 74.35,55.312 77.188,58.15 82.712,58.15 89.725,51.137 89.725,45.981 89.75,45.956 89.75,43.957 90.1,43.606 v1(90.1,43.6)
  L6 BOT w0.2: v1(90.1,43.6) 90.126,43.574 92.205,43.574 92.77,43.009 92.77,42.275 U34.8@92.875,42.17
SOM_TEC_nCS_3: P2.65 U34.9 | length 34.4
  L1 TOP w0.2: P2.65@73.979,53.22 73.979,54.459 73.95,54.488 73.95,54.7 73.95,55.478 77.022,58.55 82.878,58.55 90.125,51.303 90.125,46.146 90.15,46.122 90.15,44.346 90.418,44.078 v1(90.418,44.024)
  L6 BOT w0.2: v1(90.418,44.024) 92.405,44.024 93.42,43.009 93.42,42.275 U34.9@93.525,42.17
SOM_TEC_nCS_4: P2.63 U34.10 | length 36
  L1 TOP w0.2: P2.63@73.579,53.22 73.579,54.542 73.55,54.571 73.55,54.7 73.55,55.643 76.857,58.95 83.043,58.95 90.525,51.468 90.525,48.149 90.8,47.874 v1(90.8,44.5)
  L6 BOT w0.2: v1(90.8,44.5) 93,44.5 94.175,43.325 U34.10@94.175,42.17
SOM_TEC_SPI6_MISO: P1.59 R286.1 R292.1 U18.18 U19.18 U20.18 U21.18 | length 146.4
  L1 TOP w0.2: 74.618,31 74.825,30.793 P1.59@74.825,29.69
  L1 TOP w0.28: 74.618,31 73.601,32.017 73.32,32.298 72.823,32.795 72.823,33.177 v1(72.8,33.2) 72.832,33.2 73.192,33.56 73.909,33.56 74.359,34.01 77.938,34.01 78.338,34.41 80.418,34.41 80.818,34.81 83.217,34.81 84.697,36.29 85.007,36.6 87.8,36.6 90.1,34.3 90.1,30.2 88.8,28.9 v1(88.8,26.2) ; R286.1@108.1,41.825 v1(108.1,42.4)
  L3 SIGNAL w0.25: v1(101.5,17.473) 102.248,16.725 103.567,16.725 103.617,16.675 106.003,16.675 106.953,17.625 107.747,17.625 108.097,17.975 110.347,17.975 110.847,17.475 v1@111.492,17.475 ; v1(101.75,26.573) 102.498,25.825 103.038,25.825 103.567,25.825 103.817,25.575 106.853,25.575 107.003,25.725 108.535,25.725 109.895,27.085 111.248,27.085 v1(111.75,26.583)
  L3 SIGNAL w0.28: v1(46.9,43.7) 45.45,42.25 45.45,39.617 47.877,37.19 58.803,37.19 59.313,36.68 68.191,36.68 68.801,36.07 69.502,36.07 71.802,33.77 72.23,33.77 v1(72.8,33.2) ; v1(88.8,26.2) 87.91,25.31 87.91,24.497 88.882,23.525 96.376,23.525 99.941,27.09 100.603,27.09 101.103,26.59 101.733,26.59 v1(101.75,26.573)
  L6 BOT w0.2: R292.1@46.325,43.5 46.646,43.5 46.846,43.7 v1(46.9,43.7)
  L6 BOT w0.25: 109.725,21.44 109.725,23.307 109.75,23.332 109.75,23.592 109.925,23.767 109.925,24.533 109.75,24.708 109.75,26.632 110.203,27.085 111.248,27.085 v1(111.75,26.583) ; 109.726,21.439 109.726,20.397 109.955,20.168 109.955,19.018 v1(111.5,17.473)
  L6 BOT w0.28: v1(108.1,42.4) 109.1,43.4 111.8,43.4 114.99,40.21 114.99,39.053 114.904,38.968 114.904,37.811 115,37.715 115,37.093 115.19,36.903 115.19,35.483 115.103,35.396 115.103,31.068 114.59,30.555 114.59,27.49 114.09,26.99 113.997,26.99 113.71,26.703 113.71,26.61 113.683,26.583 v1(111.75,26.583)
SOM_TEC_SPI6_MOSI: P1.61 R287.1 R293.1 U18.17 U19.17 U20.17 U21.17 | length 154.6
  L1 TOP w0.2: 73.8,32.497 75.225,31.072 P1.61@75.225,29.69
  L1 TOP w0.25: U19.17@102,17.01 102,18.05 v1(102.05,18.1) ; U18.17@102.25,26.11 102.25,27 102.375,27.125 102.375,27.675 v1(102.4,27.7) ; U21.17@112,17.01 112,18.05 v1(112.05,18.1) ; v1(112.1,27.7) 112.1,26.905 112.25,26.755 U20.17@112.25,26.11
  L1 TOP w0.28: 73.8,32.497 v1(73.8,33) 73.823,33.023 74.051,33.023 74.558,33.53 78.137,33.53 78.297,33.69 80.517,33.69 80.894,33.313 83.413,33.313 85.6,35.5 88.2,35.5 89.44,34.26 89.44,30.34 87.8,28.7 87.8,26.2 v1(89.1,24.9) ; R287.1@109,41.825 v1(109,42.4)
  L3 SIGNAL w0.25: v1(102.05,18.1) 102.079,18.129 102.079,18.55 102.503,18.975 103.052,18.975 103.602,18.425 105.767,18.425 106.867,19.525 107.553,19.525 107.903,19.875 110.188,19.875 110.888,19.175 112.283,19.175 113.025,18.433 113.025,17.403 112.747,17.125 112.353,17.125 112.05,17.428 v1@112.05,18.11 ; v1(102.4,27.7) 102.425,27.7 102.9,27.225 106.353,27.225 106.813,27.685 109.222,27.685 109.522,27.985 111.774,27.985 112.059,27.7 v1(112.1,27.7)
  L3 SIGNAL w0.28: v1(46.9,44.4) 47.49,43.81 47.49,42.683 46.41,41.603 46.41,40.015 48.275,38.15 59.201,38.15 59.371,37.98 68.248,37.98 69.198,37.03 69.899,37.03 72.199,34.73 72.642,34.73 73.777,33.595 73.777,33.023 v1(73.8,33) ; v1(89.1,24.9) 92.129,24.9 92.544,24.485 95.978,24.485 99.543,28.05 102.018,28.05 102.368,27.7 v1(102.4,27.7)
  L6 BOT w0.2: R293.1@46.325,44.4 v1(46.9,44.4)
  L6 BOT w0.25: v1(112.05,18.1) 112.05,17.351 111.224,16.525 110.453,16.525 109.675,17.303 109.675,18.662 109.505,18.832 109.505,19.982 109.276,20.211 109.276,21.252 108.525,22.003 108.525,22.397 108.525,23.007 109.193,23.675 109.197,23.675 109.475,23.953 109.475,24.347 109.3,24.522 109.3,26.818 110.182,27.7 v1(112.1,27.7) ; v1@112.1,27.699 112.474,27.325 113.266,27.325 113.565,27.624 113.565,28.063 113.1,28.528 113.1,30.422
  L6 BOT w0.28: v1(109,42.4) 109.5,42.9 111.293,42.9 114.09,40.103 114.09,39.583 113.91,39.403 113.91,38.997 114.09,38.817 114.09,34.369 114.07,34.349 114.07,31.392 113.1,30.422
SOM_TEC_SPI6_SCK: P1.63 R282.1 R291.1 U18.16 U19.16 U20.16 U21.16 | length 146.7
  L1 TOP w0.2: P1.63@75.625,29.69 75.625,31 75.625,31.294
  L1 TOP w0.25: U19.16@102.5,17.01 102.5,17.55 v1(102.55,17.6) ; U18.16@102.75,26.11 102.75,26.65 v1(102.8,26.7) ; U21.16@112.5,17.01 112.5,17.55 v1(112.55,17.6) ; U20.16@112.75,26.12 112.75,26.828 112.725,26.853 112.725,27.684 112.8,27.759 v1(112.8,27.8)
  L1 TOP w0.28: 75.625,31.294 75.625,31.375 v1(74.4,32.6) 74.432,32.6 74.646,32.813 76.78,32.813 76.883,32.71 79.017,32.71 79.14,32.833 83.467,32.833 86.015,30.285 86.015,27.085 86.61,26.49 86.903,26.49 87.19,26.203 87.19,25.91 v1(88.4,24.7) ; R282.1@107.2,41.825 v1(107.2,42.4)
  L3 SIGNAL w0.25: v1(102.55,17.6) 103.328,17.6 103.803,17.125 105.103,17.125 106.553,18.575 110.383,18.575 110.733,18.225 111.347,18.225 111.697,18.575 112.247,18.575 112.55,18.272 v1@112.55,17.61 ; v1(102.8,26.7) 103.225,26.275 103.753,26.275 104.003,26.025 106.253,26.025 106.953,26.725 108.899,26.725 109.709,27.535 111.435,27.535 111.745,27.225 112.297,27.225 112.771,27.7 112.771,27.771 v1(112.8,27.8)
  L3 SIGNAL w0.28: v1(47,43) 45.93,41.93 45.93,39.816 48.076,37.67 59.002,37.67 59.512,37.16 68.389,37.16 68.999,36.55 69.701,36.55 72.001,34.25 72.443,34.25 73.29,33.403 73.29,32.817 73.597,32.51 74.003,32.51 74.07,32.577 74.377,32.577 v1(74.4,32.6) ; v1(88.4,24.7) 89.095,24.005 96.177,24.005 99.742,27.57 100.802,27.57 101.225,27.146 102.321,27.146 102.768,26.7 v1(102.8,26.7)
  L6 BOT w0.2: R291.1@46.325,42.6 46.425,42.7 46.686,42.7 46.986,43 v1(47,43)
  L6 BOT w0.25: 112.479,28.3 109.9,28.3 108.8,27.2 108.8,24.622 108.525,24.347 108.525,23.953 108.576,23.902 108.576,23.695 108.075,23.193 108.075,22.583 108.075,21.817 108.826,21.066 108.826,20.025 109.055,19.796 109.055,18.645 109.225,18.475 109.225,17.117 110.591,15.751 110.591,15.387 111.453,14.525 113.047,14.525 113.325,14.803 113.325,16.825 v1(112.55,17.6) ; v1(112.8,27.8) 112.8,28.021
  L6 BOT w0.28: v1(107.2,42.4) 107.76,41.84 109.66,41.84 110.61,40.89 112.103,40.89 112.5,40.493 112.5,38.179 113.59,37.089 113.59,31.591 112.5,30.501 112.5,28.321 112.479,28.3 112.758,28.021 112.8,28.021
SOM_USB_PWR_EN1: P2.42 U38.6 | length 9.8
  L1 TOP w0.15: 68.332,48.3 69.225,49.193 69.225,49.576 69.179,49.622 P2.42@69.179,50.14
  L1 TOP w0.2: v1(63.775,43.825) 63.775,43.854 66.735,46.814 66.847,46.814 68.332,48.3
  L6 BOT w0.28: v1(63.775,43.825) U38.6@63.775,44.97
SOM_USB_PWR_EN2: P2.44 U38.7 | length 9.6
  L1 TOP w0.15: 68.898,48.3 69.525,48.927 69.525,49.602 69.579,49.656 P2.44@69.579,50.14
  L1 TOP w0.2: v1(64.409,43.852) 66.972,46.414 67.012,46.414 68.898,48.3
  L6 BOT w0.28: v1(64.409,43.852) 64.425,43.868 U38.7@64.425,44.97
SOM_USB_PWR_EN3: P2.48 U38.8 | length 9.6
  L1 TOP w0.2: v1(65.075,43.85) 69.525,48.3 70.404,49.179 70.404,49.616 70.379,49.641 P2.48@70.379,50.14
  L6 BOT w0.28: v1(65.075,43.85) U38.8@65.075,44.97
SOM_USB_PWR_EN4: P2.50 U38.9 | length 9.5
  L1 TOP w0.15: 70.183,48.3 70.729,48.846 70.729,49.701 70.779,49.751 P2.50@70.779,50.14
  L1 TOP w0.2: v1(65.725,43.842) 70.183,48.3
  L6 BOT w0.28: v1(65.725,43.842) U38.9@65.725,44.97
SOM_USB_PWR_nOC1: P2.85 U40.7 | length 18.5
  L1 TOP w0.2: P2.85@77.979,53.22 77.979,53.914 77.95,53.943 77.95,54.386 78.264,54.7 78.514,54.95 81.386,54.95 83.85,52.486 83.85,43.904 83.7,43.754 v1(83.7,43.7)
  L6 BOT w0.28: v1(83.7,43.7) 83.7,43.732 83.725,43.757 U40.7@83.725,44.97
SOM_USB_PWR_nOC2: P2.83 U40.8 | length 19.8
  L1 TOP w0.2: P2.83@77.579,53.22 77.579,54.581 77.698,54.7 78.348,55.35 81.552,55.35 84.4,52.502 v1(84.4,43.7)
  L6 BOT w0.28: U40.8@84.375,44.97 84.375,43.757 84.4,43.732 v1(84.4,43.7)
SOM_USB_PWR_nOC3: P2.81 U40.9 | length 21.2
  L1 TOP w0.2: P2.81@77.179,53.22 77.179,54.7 77.179,54.747 78.182,55.75 81.718,55.75 85,52.468 v1(85,43.7)
  L6 BOT w0.28: v1(85,43.7) 85,43.732 85.025,43.757 U40.9@85.025,44.97
SOM_USB_PWR_nOC4: P2.78 U40.3 | length 9.7
  L1 TOP w0.15: P2.78@76.379,50.14 76.379,48.807 76.83,48.356 76.83,48.3
  L1 TOP w0.2: 76.83,48.3 76.83,46.77 v1(77.3,46.3)
  L6 BOT w0.28: v1(77.3,46.3) 77.323,46.323 77.502,46.323 78.069,46.89 80.31,46.89 81.06,46.14 81.06,45.035 U40.3@81.125,44.97
SOM_USB_SW_nOE: P2.60 U14.3 | length 8.4
  L1 TOP w0.15: 72.779,48.3 P2.60@72.779,50.14
  L1 TOP w0.2: v1(72.225,43.55) 72.225,45.569 72.15,45.644 72.15,47.608 72.779,48.237 72.779,48.3
  L6 BOT w0.28: U14.3@71.925,44.97 71.925,43.85 v1(72.225,43.55)
SOM_USB_SW_SEL0: P2.68 U14.5 | length 8.3
  L1 TOP w0.15: P2.68@74.379,50.14 74.379,48.456 74.475,48.36 74.475,48.3
  L1 TOP w0.2: v1(73.5,43.7) 73.5,45.4 74.475,46.375 74.475,48.3
  L6 BOT w0.28: U14.5@73.225,44.97 73.29,44.905 73.29,43.942 73.5,43.732 v1(73.5,43.7)
SOM_USB_SW_SEL1: P2.62 U14.4 | length 5.4
  L1 TOP w0.15: 73.179,48.3 P2.62@73.179,50.14
  L1 TOP w0.2: v1(72.6,46.2) 72.6,47.492 73.179,48.071 73.179,48.3
  L6 BOT w0.28: U14.4@72.575,44.97 72.588,44.983 72.588,46.187 v1(72.6,46.2)
SOM_USB_USB2_N: P1.5 U27.3 | length 39.8
  L1 TOP w0.22: U27.3@32.55,19.17 32.57,19.19 32.57,19.696 32.61,19.736 32.61,20.19 33.46,21.04 43.696,21.04 43.921,20.815 53.778,20.815 61.42,28.457 61.42,30.757 61.943,31.28 63.392,31.28 64.015,30.657 64.015,29.7 P1.5@64.025,29.69
SOM_USB_USB2_P: P1.3 U27.2 | length 39.4
  L1 TOP w0.22: U27.2@33.05,19.17 33.03,19.19 33.03,19.696 32.99,19.736 32.99,20.033 33.617,20.66 38.2,20.66 39.038,20.66 cw(c39.038,20.44) 39.258,20.44 39.258,20.259 ccw(c39.44,20.259) 39.44,20.077 39.804,20.077 ccw(c39.804,20.259) 39.986,20.259 39.986,20.44 cw(c40.206,20.44) 40.206,20.66 41.214,20.66 43.539,20.66 43.764,20.435 53.935,20.435 61.8,28.3 61.8,30.6 62.1,30.9 63.235,30.9 63.635,30.5 63.635,29.7 P1.3@63.625,29.69
SPI1_MISO: P1.51 R65.1 | length 78.1
  L1 TOP w0.15: P1.51@73.225,29.69 73.225,31
  L1 TOP w0.2: v1(71.8,32.3) 71.838,32.262 72.14,32.262 73.225,31.177 73.225,31
  L1 TOP w0.28: R65.1@125.125,22 v1(126.1,22)
  L3 SIGNAL w0.28: v1(71.8,32.3) 71.823,32.277 72.333,32.277 73.06,31.55 75.178,31.55 76.338,32.71 78.703,32.71 78.826,32.833 80.695,32.833 82.528,31 83,30.528 83.448,30.08 89.016,30.08 92.031,33.095 96.492,33.095 96.747,33.35 98.001,33.35 98.141,33.49 100.531,33.49 102.551,31.47 103.683,31.47 104.823,30.33 107.902,30.33 108.682,31.11 109.533,31.11 110.033,31.61 113.766,31.61 115.626,33.47 116.477,33.47 121.476,33.47 126.198,33.47 126.368,33.3 v1(126.4,33.3)
  L6 BOT w0.28: v1(126.1,22) 126.5,22.4 126.5,24.59 124.52,26.57 124.52,29.499 126.38,31.359 v1@126.38,33.3 ; v1(126.4,33.3) v1@126.4,33.332
SPI1_MOSI: P1.45 R64.1 U36.5 | length 91.9
  L1 TOP w0.15: P1.45@72.025,29.69 72.025,30.433 72.077,30.485 v1@72.077,31
  L1 TOP w0.28: v1@72.077,31 72.077,31.077 v1(72.1,31.1) ; v1(102.2,48.7) 102.215,48.685 103.96,48.685 U36.5@103.975,48.67 ; R64.1@125.125,22.875 125.125,25.23 127.5,27.605 v1(127.5,29.8)
  L3 SIGNAL w0.28: v1(72.1,31.1) 72.2,31 72.96,30.24 73.767,30.24 73.897,30.11 74.303,30.11 75.193,31 75.263,31.07 75.377,31.07 76.497,32.19 78.803,32.19 79.993,31 80.003,30.99 80.317,30.99 81.707,29.6 83,29.6 89.215,29.6 92.03,32.415 96.561,32.415 96.606,32.37 97.699,32.37 98.329,33 v1(99.4,33) 99.4,32.968 99.819,32.549 99.819,32.388 101.217,30.99 103.484,30.99 104.624,29.85 108.467,29.85 109.247,30.63 109.732,30.63 110.232,31.13 113.965,31.13 115.825,32.99 116.477,32.99 121.476,32.99 124.31,32.99 v1(127.5,29.8)
  L6 BOT w0.28: v1(99.4,33) 99.4,33.4 99.81,33.81 99.81,34.022 99.81,35.01 100.178,35.378 100.42,35.378 100.89,35.848 100.89,39.51 100.69,39.71 100.69,47.89 101.5,48.7 v1(102.2,48.7)